# Altium PCB mdap4.PcbDoc (part 2 of 2)
Units mil, origin at the board's own origin, x right, y up, seen from the top; angles counter-clockwise.
Board outline 1970 x 1970 mil, 4 copper layers (Top Layer, Internal Plane 1, Signal Layer 1, Bottom Layer), stack 45.004 mil thick; 152 components, 121 nets, 477 pads, 250 vias.
Unrouted connection lines stored in the file: 1.
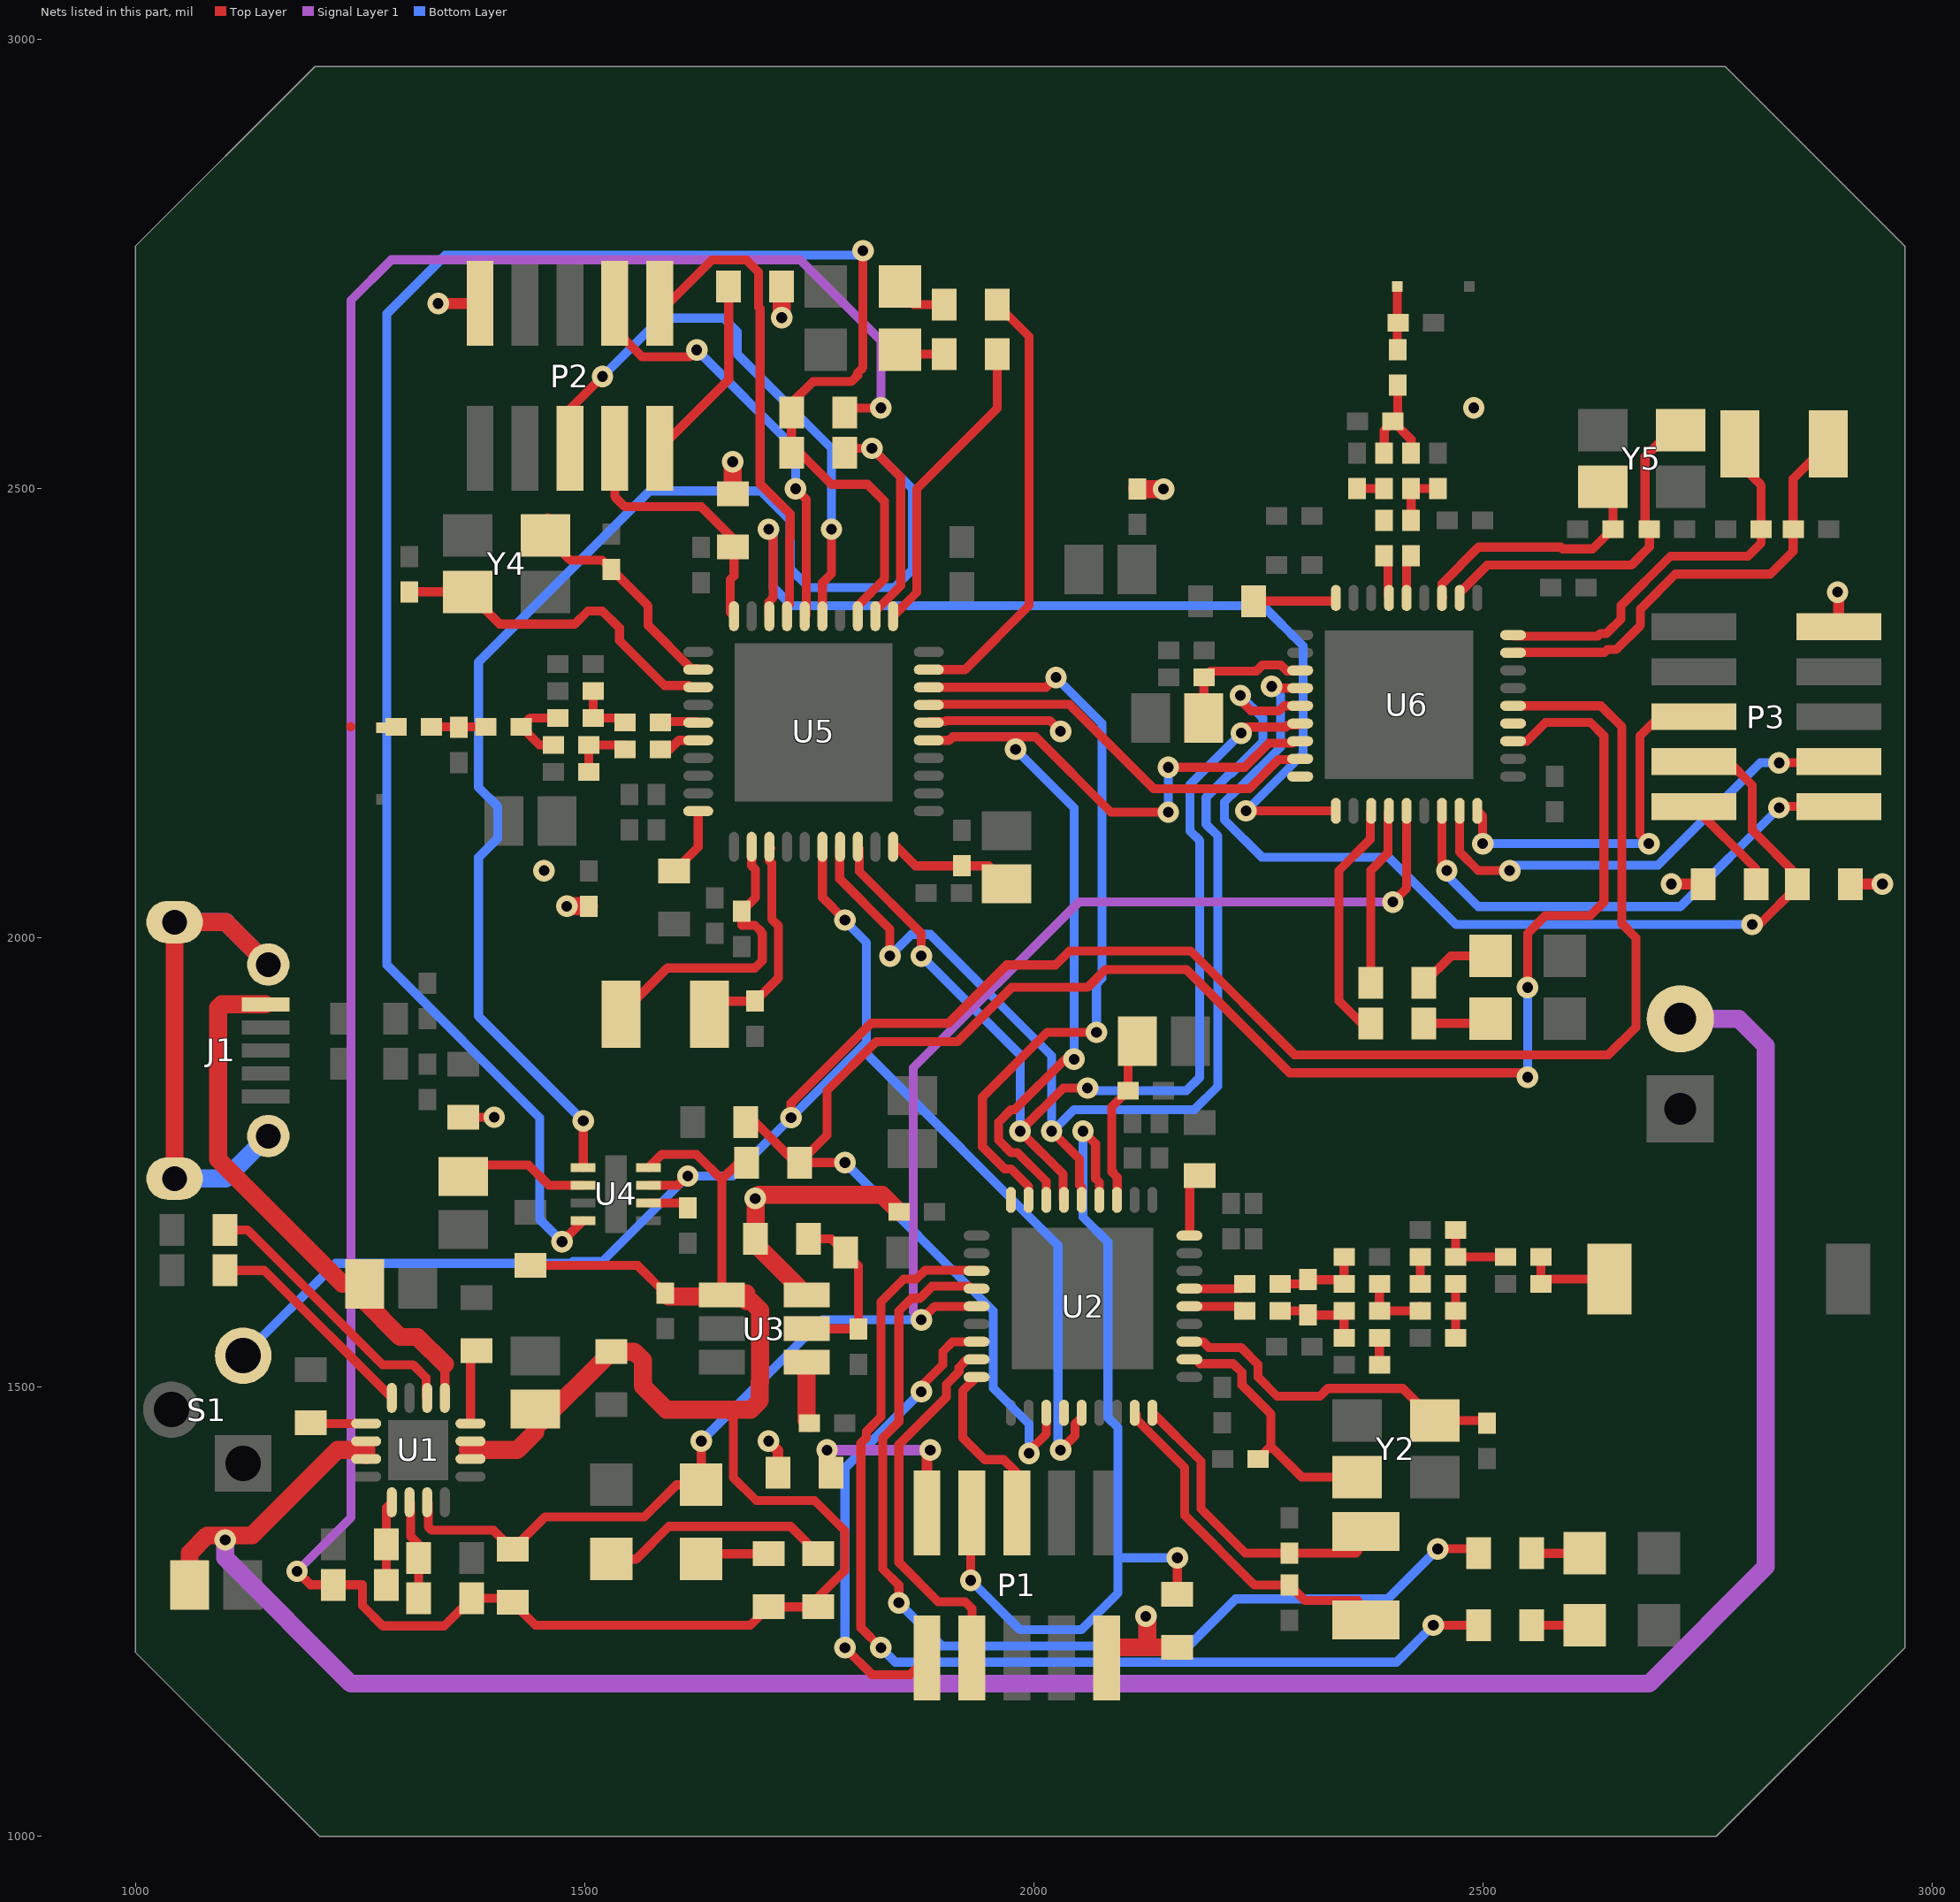
[diagram p4: the nets of this part, all layers, seen from the top]

## Via types
v1: diameter 24, hole 12, Top Layer to Bottom Layer, 219 vias
v2: diameter 31.5, hole 12, Top Layer to Bottom Layer, 27 vias
v3: diameter 24, hole 12, Top Layer to Bottom Layer, tented top, 4 vias

## Nets (pads, with @x,y where several pads share a name; then routed paths per layer and width w, separated by ;. In a path a pad name is that pad's centre, name@x,y a point inside that pad or via, vN(x,y) a via of type N, cw(c..) or ccw(c..) an arc to the next point about the centre after c; other vN are vias at no path point) (continued)
IRQ_C2510: U5.18 U6.1 | length 1095
  Top Layer w10: v1(1705,2455) 1710.1,2449.9 1710.1,2378.96 1705,2373.85 1705,2358.94 U5.18@1705.79,2358.15 ; v1(2236.5,2141.5) U6.1@2336.57,2141.5
  Bottom Layer w10: v1(1705,2455) 1710.1,2449.9 1710.1,2390.35 1730.46,2370 2255,2370 2300,2325 2300,2205 v1(2236.5,2141.5)
KILL_N: R33.1 U4.5 U5.12 | length 1670.8
  Top Layer w10: U4.5@1498.58,1744.53 v1(1498.58,1796.42) ; R33.1@1789.53,2545 v1(1820,2545) 1852,2513 1852,2392.02 1823.9,2363.92 U5.12@1823.9,2358.15
  Bottom Layer w10: v1(1498.58,1796.42) 1382,1913 1382,2089.72 1403.57,2111.29 1403.57,2146.08 1382,2167.65 1382,2307 1572.5,2497.5 1696.44,2497.5 1729,2464.94 1729,2411 1750,2390 1845,2390 1865,2410 1865,2500 v1(1820,2545)
MISO_1110: P1.10 U2.7 | length 534.7
  Top Layer w10: v1(1790,1210) 1820,1180 1862.6,1180 P1.10@1881.3,1198.7 ; v1(1875,1495) 1871.06,1495 1870,1496.06 1899,1525.06 1899,1539.6 1910.03,1550.63 U2.7@1936.5,1550.63
  Bottom Layer w10: v1(1790,1210) 1790,1410 v1(1875,1495)
MISO_2510: P3.10 U6.7 | length 573.5
  Top Layer w10: U6.7@2454.69,2141.5 2454.69,2075.31 2455,2075 v1(2460,2075) ; v1(2830,2145) 2831.3,2146.3 P3.10@2896.3,2146.3
  Bottom Layer w10: v1(2460,2075) 2460,2070 2495,2035 2720,2035 v1(2830,2145)
MISO_2540: P2.10 U5.17 | length 534.8
  Top Layer w10: P2.10@1583.7,2706.3 1593.31,2706.3 1641.72,2754.72 1680.28,2754.72 1693.75,2741.25 1693.75,2702.31 1695.53,2700.53 1695.53,2505.53 1729,2472.06 1729,2445.06 1728.1,2444.16 1728.1,2371.5 1725.47,2368.87 U5.17@1725.47,2358.15
MOSI_1110: P1.8 U2.8 | length 425.5
  Top Layer w10: P1.8@1931.3,1198.7 1931.3,1253.7 1924,1261 1894,1261 1850,1305 1850,1436.06 1903,1489.06 1903,1503.22 1917,1517.22 1917,1522 1925.94,1530.94 U2.8@1936.5,1530.94
MOSI_2510: P3.8 U6.8 | length 528.4
  Top Layer w10: U6.8@2474.37,2141.5 2474.37,2095.63 2495,2075 v1(2530,2075) ; v1@2831.3,2196.3 v1(2830,2195) 2895,2195 P3.8@2896.3,2196.3
  Bottom Layer w10: v1(2530,2075) 2536,2081 2694.94,2081 2808.94,2195 v1(2830,2195)
MOSI_2540: P2.8 U5.16 | length 483.7
  Top Layer w10: P2.8@1533.7,2706.3 1533.7,2677.12 1563.77,2647.06 1617.51,2647.06 v1(1625,2654.54) ; v1(1735,2500) 1747,2488 1747,2437.6 1746.84,2437.45 1746.84,2359.83 U5.16@1745.16,2358.15
  Bottom Layer w10: v1(1625,2654.54) 1735,2544.54 v1(1735,2500)
NetA200_1: A2.1 C68.2 L18.2 | length 70.4
  Top Layer w10: A2.1@2405,2725 2405,2655 L18.2@2405.31,2654.69
NetA300_1: A1.1 L12.2 | length 0.4
  Top Layer w10: 1239.65,2235.28 1239.92,2235
NetC107_1: C28.1 C29.1 U2.30 | length 190.3
  Top Layer w10: 2087,1739.69 2087,1812.16 2105.32,1830.47 2105.32,1874.84 C29.1@2115.47,1885 ; 2088.16,1739.69 2088.16,1738.53 2093.11,1733.58 U2.30@2093.11,1708.5
NetC109_2: C10.2 L1.2 | length 30
  Top Layer w10: C10.2@2385,1525 L1.2@2385,1555
NetC110_1: C15.1 L3.1 L6.2 | length 80.8
  Top Layer w10: L6.2@2385,1615 C15.1@2385,1585 L3.1@2430.63,1585 L3.1@2430.63,1590.16
NetC110_2: C14.2 C15.2 L1.1 L2.2 | length 104.8
  Top Layer w10: L2.2@2274.68,1585 2300.63,1585 C14.2@2305.32,1580.31 2340.94,1580.31 C15.2@2345.63,1585 L1.1@2345.63,1555
NetC111_1: C14.1 C18.2 L5.2 L6.1 | length 104.8
  Top Layer w10: L5.2@2274.68,1615 2300.63,1615 C14.1@2305.32,1619.68 2340.95,1619.68 L6.1@2345.63,1615 C18.2@2345.63,1645
NetC112_1: C19.1 L7.1 L8.1 | length 85
  Top Layer w10: C19.1@2469.68,1645.31 L8.1@2469.68,1675 ; C19.1@2470,1645 L7.1@2525.32,1645
NetC112_2: C19.2 L4.2 | length 30
  Top Layer w10: L4.2@2430.63,1615 C19.2@2430.63,1645
NetC113_2: C12.2 L3.2 L4.1 | length 59.7
  Top Layer w10: C12.2@2470,1555.32 L3.2@2470,1585 L4.1@2470,1615
NetC114_1: C17.1 E1.1 L7.2 | length 101.3
  Top Layer w10: C17.1@2564.68,1615 L7.2@2564.69,1645 L7.2@2565,1645.31 ; C17.1@2570,1620.31 E1.1@2640.87,1620.31
NetC116_2: C5.2 U2.20 Y2.1 | length 290
  Top Layer w10: U2.20@2173.82,1530.94 2180.3,1530.94 2185.08,1526.16 2222.15,1526.16 2231.84,1516.47 2231.84,1502.55 2264,1470.39 2264,1434.32 ; C5.2@2249.69,1420 2264,1434.32 ; Y2.1@2360,1400 2298.32,1400 2264,1434.32
NetC117_2: C4.2 U2.21 Y2.3 | length 384.2
  Top Layer w10: U2.21@2173.82,1550.63 2188.53,1550.63 2195,1544.16 2230.84,1544.16 2249.84,1525.16 2249.84,1511.22 2271.06,1490 2318.86,1490 2327.47,1498.61 2410.99,1498.61 Y2.3@2446.61,1462.99 2501.69,1462.99 C4.2@2505,1459.69
NetC118_2: C3.2 U2.18 Y1.1 | length 325.2
  Top Layer w10: U2.18@2132.48,1471.5 2186.32,1417.66 2186.32,1364.74 2235.74,1315.31 C3.2@2285,1315.31 2358.86,1315.31 Y1.1@2361.1,1317.56
NetC119_2: C1.2 U2.17 Y1.2 | length 370.4
  Top Layer w10: U2.17@2112.48,1471.5 2114.48,1469.5 2114.48,1464.04 2168.32,1410.21 2168.32,1357.29 2245.92,1279.69 C1.2@2285,1279.69 2302.24,1262.44 Y1.2@2361.1,1262.44 ; U2.17@2112.8,1471.5 U2.17@2113.53,1470.76
NetC207_1: C44.1 C47.1 U6.30 | length 160.6
  Top Layer w10: C44.1@2189.53,2245 C47.1@2189.53,2289.53 ; C47.1@2190,2290 2197.16,2297.16 2248.22,2297.16 2255.06,2304 2274.94,2304 2281.78,2297.16 2296.81,2297.16 U6.30@2296.81,2297.8
NetC209_2: C58.1 C66.2 L17.1 | length 65.6
  Top Layer w10: C58.1@2420.32,2464.69 L17.1@2420.31,2500.32 C66.2@2450.32,2500.32
NetC210_2: C58.2 U6.23 | length 48.9
  Top Layer w10: U6.23@2415.32,2378.5 2415.32,2420.31 C58.2@2420.32,2425.32
NetC211_1: C57.1 C65.2 L16.1 | length 30
  Top Layer w10: L16.1@2360.31,2500.32 C65.2@2390.32,2500.32
NetC211_2: C57.2 U6.24 | length 47.3
  Top Layer w10: C57.2@2390.32,2425.32 2394.44,2421.19 U6.24@2394.44,2379.69
NetC212_1: C65.1 C67.2 L17.2 L18.1 | length 125.6
  Top Layer w10: C65.1@2390.32,2539.69 2390.32,2565.32 C67.2@2400,2575 ; L18.1@2405.31,2615.32 2405.31,2580.32 C67.2@2400,2575 ; L17.2@2420.31,2539.69 2420.31,2554.69 C67.2@2400,2575
NetC215_2: C59.2 U6.20 Y5.1 | length 392.1
  Top Layer w10: U6.20@2474.37,2378.5 2474.37,2384.27 2505.1,2415 2665.32,2415 2685.63,2435.32 C59.2@2685.63,2455 2680.76,2459.87 2680.76,2535.44 2710.32,2565 Y5.1@2720.32,2565
NetC216_2: C61.2 U6.21 Y5.3 | length 285.4
  Top Layer w10: U6.21@2455.32,2379.13 U6.21@2454.69,2378.5 2454.69,2394.37 2495.32,2435 2587.01,2435 2588.85,2433.16 2622.41,2433.16 2644.25,2455 C61.2@2645,2455 2645,2490.71 Y5.3@2633.7,2502.01
NetC217_2: C62.2 U6.18 Y6.1 | length 417
  Top Layer w10: U6.18@2533.82,2337.17 2534.98,2336 2628.15,2336 2631.15,2339 2637.94,2339 2654,2355.06 2654,2370.05 2708.95,2425 2795.32,2425 2810,2439.69 C62.2@2810,2455 2810,2503.86 Y6.1@2792.76,2521.1
NetC218_2: C60.2 U6.17 Y6.2 | length 505
  Top Layer w10: U6.17@2533.82,2317.48 2534.34,2318 2635.6,2318 2638.6,2321 2648.52,2321 2675.64,2348.12 2675.64,2366.23 2714.41,2405 2820.32,2405 2845.63,2430.32 C60.2@2845.63,2455 2845.63,2511.1 Y6.2@2884.53,2550
NetC309_1: C45.1 C46.2 L14.1 | length 65.6
  Top Layer w10: L14.1@1509.68,2275 C46.2@1509.69,2245 C45.1@1545.32,2245
NetC309_2: C45.2 U5.25 | length 46.6
  Top Layer w10: C45.2@1584.69,2245 1584.69,2240.82 1625.48,2240.82 U5.25@1626.65,2239.65
NetC310_1: C46.1 L11.2 L13.1 | length 88.7
  Top Layer w10: L11.2@1465.31,2215 1449.68,2215 L13.1@1429.68,2235 1439.69,2245 C46.1@1470.32,2245
NetC311_2: C42.2 L12.1 L13.2 | length 60.6
  Top Layer w10: L12.1@1329.68,2235 L13.2@1390.31,2235
NetC312_1: C41.2 C43.1 L11.1 | length 70.6
  Top Layer w10: C41.2@1504.69,2185 L11.1@1504.68,2215 C43.1@1545.31,2215
NetC312_2: C43.2 U5.26 | length 46.1
  Top Layer w10: C43.2@1584.69,2210 1595.08,2210 1605.04,2219.96 U5.26@1626.65,2219.96
NetC314_2: C50.2 U5.23 Y4.1 | length 387.1
  Top Layer w10: C50.2@1305,2385.31 1369.69,2385.31 Y4.1@1370,2385 1405.62,2349.38 1489.14,2349.38 1503.77,2364 1506,2364 1519.94,2364 1539,2344.94 1539,2331 1589,2281 1616.16,2281 1616.16,2279.02 U5.23@1626.65,2279.02
NetC315_2: C55.2 U5.22 Y4.3 | length 247.6
  Top Layer w10: Y4.3@1456.61,2447.99 1483.98,2420.62 1519.69,2420.62 C55.2@1530,2410.31 1570.84,2369.47 1570.84,2348.02 1618.99,2299.87 1625.48,2299.87 U5.22@1626.65,2298.7 ; Y4.3@1458.9,2467.56 Y4.3@1461.14,2465.31
NetC316_2: C30.2 U5.33 Y3.1 | length 245.9
  Top Layer w10: Y3.1@1639.21,1915 1653.9,1929.69 C30.2@1690,1929.69 1716,1955.69 1716,2013.39 1708.42,2020.98 1708.42,2083.5 1705.79,2086.13 U5.33@1705.79,2101.46 U5.33@1707.42,2099.83
NetC317_2: C32.2 U5.32 Y3.2 | length 333.7
  Top Layer w10: Y3.2@1540.79,1915 1592.29,1966.5 1689.81,1966.5 1698,1974.69 1698,2004.88 ; U5.32@1686.1,2101.46 1686.1,2080.36 1690.42,2076.04 1690.42,2045.1 C32.2@1675,2029.69 1675,2014.13 1689.81,2014.13 1696.84,2007.1 1696.84,2006.03 1697,2005.88
NetC318_2: C34.2 C36.2 U5.40 | length 143.4
  Top Layer w10: U5.40@1843.58,2101.46 1847.48,2101.46 1868.63,2080.31 C36.2@1920,2080.31 1950.16,2080.31 C34.2@1970,2060.47
NetC401_2: C7.2 U3.4 | length 68.9
  Top Layer w20: U3.4@1747.24,1527.6 1747.24,1463.07 C7.2@1750.31,1460
NetC402_2: C9.2 R17.2 R18.1 U3.5 | length 196.1
  Top Layer w10: U3.5@1747.24,1565 1804.68,1565 C9.2@1805,1564.69 1805,1635 1775,1665 R18.1@1749.53,1665
NetC404_2: C2.2 P4.2 U1.2 U1.3 | length 2822.4
  Top Layer w20: C2.2@1060.47,1280 1060.47,1315.47 1080,1335 1130,1335 1225,1430 1255,1430 1256.93,1431.93 U1.3@1256.93,1423.98
  Signal Layer 1 w20: v1(1100,1330) 1100,1310 1240,1170 2685,1170 2815,1300 2815,1880 2785,1910 P4.2@2720,1910
NetC406_2: C20.2 U4.2 | length 45.8
  Top Layer w10: U4.2@1571.42,1705.16 1609.53,1705.16 C20.2@1615,1699.69
NetC407_2: C23.2 U4.6 | length 127.9
  Top Layer w10: C23.2@1380,1747.4 1437.6,1747.4 1460.16,1724.84 U4.6@1498.58,1724.84
NetD1_1: D1.1 R9.2 | length 59.1
  Top Layer w10: R9.2@2554.53,1315 D1.1@2613.66,1315
NetD2_1: D2.1 R2.2 | length 59.1
  Top Layer w10: R2.2@2554.53,1235 D2.1@2613.66,1235
NetD3_1: D3.1 R36.2 | length 34.1
  Top Layer w10: D3.1@1866.34,2705 R36.2@1900.47,2705
NetD4_1: D4.1 R35.2 | length 49.1
  Top Layer w10: D4.1@1851.34,2650 R35.2@1900.47,2650
NetD5_1: D5.1 R27.2 | length 86.6
  Top Layer w10: R27.2@2434.53,1950 2464.53,1980 D5.1@2508.66,1980
NetD6_1: D6.1 R25.2 | length 69.1
  Top Layer w10: R25.2@2434.53,1905 D6.1@2503.66,1905
NetD400_1: D7.1 R4.1 | length 257.7
  Top Layer w10: D7.1@1530,1308.66 1557.56,1308.66 1593.9,1345 1729.53,1345 R4.1@1760,1314.53
NetD401_1: D8.1 R3.1 | length 96.9
  Top Layer w10: D8.1@1616.22,1294.88 1635.87,1314.53 R3.1@1705,1314.53
NetJ1_6: J1.6 J1.7 J1.8 J1.9 | length 607.4
  Top Layer w20: J1.7@1043.62,1732.28 J1.9@1043.62,2017.72 1100.71,2017.72 J1.8@1147.95,1970.47
  Bottom Layer w20: J1.7@1068.62,1732.28 1100.71,1732.28 J1.6@1147.95,1779.53 ; J1.9@1068.62,2017.72 1101.2,2017.72 1101.2,2017.23 J1.8@1147.95,1970.47
NetL102_1: L2.1 U2.23 | length 63.6
  Top Layer w10: U2.23@2173.82,1590 2230.31,1590 L2.1@2235.31,1585
NetL106_1: L5.1 U2.24 | length 63.7
  Top Layer w10: U2.24@2173.82,1609.68 2230,1609.68 L5.1@2235.31,1615
NetP1_9: P1.9 R11.2 | length 213.3
  Top Layer w12: v1(1770,1430) 1774.53,1425.47 R11.2@1774.53,1405 ; P1.9@1881.3,1360.12 1881.3,1426.3 v1(1885,1430)
  Signal Layer 1 w12: v1(1770,1430) v1(1885,1430)
NetP2_9: P2.9 R37.2 | length 211.9
  Top Layer w10: P2.9@1583.7,2544.88 1660.47,2621.65 R37.2@1660.47,2725
NetP3_9: P3.9 R29.2 | length 115.1
  Top Layer w10: P3.9@2734.88,2146.3 2804.53,2076.65 R29.2@2804.53,2060
NetR2_1: R9.1 U2.4 | length 1151
  Top Layer w10: v1(1850,1260) 1850,1279.54 1832,1297.54 1832,1443.51 1850,1461.51 1850,1585 1864,1599 1873.54,1599 1886.86,1612.32 1927.71,1612.32 1930.34,1609.68 U2.4@1936.5,1609.68 ; v1(2450,1320) 2490.47,1320 R9.1@2495.47,1315
  Bottom Layer w10: v1(1850,1260) 1898,1212 2172.68,1212 2225,1264.32 2394.32,1264.32 v1(2450,1320)
NetR3_1: R2.1 U2.3 | length 1214.1
  Top Layer w10: v1(1830,1210) 1807.72,1232.28 1807.72,1437.72 1814,1444 1814,1450.97 1830,1466.97 1830,1595 1855.28,1620.28 1869.37,1620.28 1879.4,1630.32 1935.55,1630.32 U2.3@1936.5,1629.37 ; v1(2445,1235) R2.1@2495.47,1235
  Bottom Layer w10: v1(1830,1210) 1846,1194 2404,1194 v1(2445,1235)
NetR4_1: R36.1 U5.9 | length 490.9
  Top Layer w10: U5.9@1883.35,2298.7 1923.7,2298.7 1995,2370 1995,2669.53 R36.1@1959.53,2705
NetR5_1: R35.1 U5.11 | length 339.9
  Top Layer w10: U5.11@1843.58,2358.15 1870,2384.57 1870,2500 1959.53,2589.53 R35.1@1959.53,2650
NetR8_1: R27.1 U6.4 | length 199.8
  Top Layer w10: R27.1@2375.47,1950 2375.47,2075.47 2394.44,2094.44 2394.44,2140.31 U6.4@2395.63,2141.5
NetR9_1: R25.1 U6.3 | length 272.2
  Top Layer w10: R25.1@2375.47,1905 2365,1905 2340,1930 2340,2075 2374.76,2109.76 2374.76,2140.31 U6.3@2375.94,2141.5
NetR101_2: R20.2 U2.27 | length 62.9
  Top Layer w10: U2.27@2173.82,1668.74 R20.2@2173.82,1731.65
NetR202_2: R31.2 U6.27 | length 93.2
  Top Layer w10: R31.2@2244.84,2375 2333.07,2375 U6.27@2336.57,2378.5
NetR305_2: R28.2 U5.30 | length 77.7
  Top Layer w10: R28.2@1600,2074.53 1626.65,2101.18 U5.30@1626.65,2141.22
NetR404_1: R6.1 R8.2 U1.6 | length 111.2
  Top Layer w10: U1.6@1305.16,1371.93 1306.31,1370.78 1306.31,1334.17 1315.47,1325 R6.1@1315.47,1265
NetR405_1: R7.1 R10.2 U1.5 | length 94.4
  Top Layer w10: R7.1@1279.53,1280 R10.2@1279.53,1325 1279.53,1365.98 U1.5@1285.47,1371.93
NetR407_2: R19.2 U1.14 | length 315.1
  Top Layer w10: R19.2@1099.53,1675 1125,1675 1275,1525 1309.04,1525 1323.67,1510.37 1323.67,1489.24 U1.14@1324.84,1488.07
NetR409_2: R12.2 U1.1 | length 61
  Top Layer w10: R12.2@1195.94,1459.53 U1.1@1256.93,1459.53
NetR410_2: R14.2 U1.12 | length 83.8
  Top Layer w10: U1.12@1373.07,1459.53 1373.07,1533.54 R14.2@1380,1540.47
NetR411_2: R15.2 U1.16 | length 244.7
  Top Layer w10: R15.2@1099.53,1630 1143.54,1630 U1.16@1285.47,1488.07
NetU100_13: U2.13
NetU100_36: U2.36
NetU200_13: U6.13
NetU200_36: U6.36
NetU300_6: U5.6 | length 152.6
  Top Layer w10: U5.6@1883.35,2239.65 1884.7,2241 1901.6,2241 1902.6,2242 2018,2242 v1(2030,2230)
PB_N: S1.2 U2.14 U4.3 U5.36 U6.14 | length 3284.2
  Top Layer w10: U4.3@1571.42,1724.84 1603.88,1724.84 1614.04,1735 v1(1615,1735) ; v1(1730,1800) 1730,1816.01 1818.99,1905 1905,1905 1970,1970 2024.54,1970 2040,1985.46 2175,1985.46 2290.46,1870 2640,1870 2670.6,1900.6 2670.6,2000.04 2655,2015.64 2655,2235 2631.57,2258.43 U6.14@2533.82,2258.43 ; U5.36@1764.84,2101.46 1764.84,2045.16 v1(1790,2020) ; v1(2030,1430) 2046,1446 2046,1459.01 2053.43,1466.43 U2.14@2053.43,1471.5
  Bottom Layer w10: S1.2@1126.34,1535 S1.2@1120,1535 1222.89,1637.89 1484.94,1637.89 1487.05,1640 1520,1640 v1(1615,1735) 1665,1735 v1(1730,1800) 1814,1884 ; v1(1790,2020) 1790,2018.94 1814,1994.94 1814,1884 ; v1(2030,1430) 2027.25,1432.75 2027.25,1657.75 1814,1871 1814,1884
REQ_KILL: R33.2 R34.1 U4.8 U5.13 | length 2264.5
  Top Layer w10: v1@1475,1655 v1(1475,1661.89) U4.8@1498.58,1685.47 ; R33.2@1730.47,2540 R34.1@1730.47,2585 1730.47,2595.47 1754.38,2619.38 1797.25,2619.38 1804.28,2626.41 1804.28,2629.28 1810,2635 v1(1810,2765) ; R33.2@1730.47,2545 1735,2545 1775,2505 1815,2505 1833.72,2486.28 1834,2486.28 1834,2399.48 1804.21,2369.69 U5.13@1804.21,2358.15
  Bottom Layer w10: v1(1475,1661.89) 1450,1686.89 1450,1800 1280,1970 1280,2695 1345,2760 1805,2760 v1(1810,2765)
RST_1110: P1.7 R1.1 U2.31 | length 1001.1
  Top Layer w10: v1(1930,1285) 1930,1358.82 P1.7@1931.3,1360.12 ; v1(2055,1785) 2069,1771 2069,1732.24 2073.11,1728.12 U2.31@2073.11,1708.5 ; R1.1@2160,1269.53 v1(2160,1310)
  Bottom Layer w10: v1(1930,1285) 1985,1230 2053,1230 2094,1271 2094,1310 ; v1@2053.94,1785 v1(2055,1785) 2055,1689.24 2082.75,1661.49 2082.75,1466.19 2094,1454.94 2094,1310 ; v1(2160,1310) 2094,1310
RST_2510: P3.7 R30.1 U6.31 | length 1116.4
  Top Layer w10: v1@2273.11,2278.11 U6.31@2296.81,2278.11 ; P3.7@2734.88,2196.3 2773.7,2196.3 2800,2170 2800,2120.02 2850.47,2069.55 R30.1@2850.47,2060 2850.47,2057.48 2807.99,2015 v1(2800,2015)
  Bottom Layer w10: v1(2265,2280) 2275,2270 2275,2212.42 2228.07,2165.5 2226.55,2165.5 2212.5,2151.44 2212.5,2131.55 2254.05,2090 2395,2090 2470,2015 v1(2800,2015)
RST_2540: P2.7 R32.1 U5.20 | length 296.4
  Top Layer w10: P2.7@1533.7,2544.88 1533.7,2491.3 1545,2480 1630,2480 1666.08,2443.92 1666.42,2443.92 1665,2442.5 1665,2436.89 1666.42,2435.47 1666.42,2403.15 1662.1,2398.84 1662.1,2362.46 U5.20@1666.42,2358.15
SENSE_VBATT: R21.1 R22.2 U2.12 U6.12 | length 2129.5
  Top Layer w10: R22.2@1679.53,1795 1690,1795 1735,1750 R21.1@1739.53,1750 ; v1(1790,1750) R21.1@1739.53,1750 ; v1(1995,1426.36) 1995,1428.94 2014.06,1448 U2.12@2014.06,1471.5 ; U6.12@2533.82,2219.06 2549.06,2219.06 2570,2240 2620,2240 2635,2225 2635,2040 2620,2025 2570,2025 2550,2005 v1(2550,1945) ; v1(2550,1845) 2545,1850 2285,1850 2170,1965 2080,1965 2060,1945 1975.47,1945 1915,1884.53 1824.53,1884.53 1770,1830 1770,1780.47 R21.1@1739.53,1750
  Bottom Layer w10: v1(1790,1750) 1955,1585 1955,1498.94 1995,1458.94 v1(1995,1426.36) ; v1(2550,1845) v1(2550,1945)
SPI_CK: U2.34 U5.5 U6.34 | length 1109.5
  Top Layer w10: U5.5@1883.35,2219.96 1906.02,2219.96 1910.06,2224 2002.06,2224 2086.06,2140 v1(2150,2140) ; U2.34@2014.06,1708.5 2014.06,1729.12 1982.18,1761 1975.06,1761 1961,1775.06 1961,1794.94 1975.06,1809 1979,1809 2035,1865 v1(2045,1865) ; v1(2150,2190) 2235,2190 2261.69,2216.69 2288.06,2216.69 2290.42,2219.06 U6.34@2296.81,2219.06
  Bottom Layer w10: v1(1980,2210) 2045,2145 v1(2045,1865) ; v1(2150,2140) v1(2150,2190)
SPI_MI: U2.32 U5.37 U6.32 | length 1327.8
  Top Layer w10: U5.37@1784.53,2101.46 1784,2100.93 1784,2066 1840,2010 v1(1840,1980) ; v1(2020,1785) 2051,1754 2051,1724.78 2053.43,1722.35 U2.32@2053.43,1708.5 ; v1(2230.18,2270) 2230.18,2264.82 2242.31,2252.69 2273.15,2252.69 2278.88,2258.43 U6.32@2296.81,2258.43
  Bottom Layer w10: v1(1840,1980) 1864,2004 1884.94,2004 2020,1868.94 v1(2020,1785) 2021.06,1785 2045.06,1809 2179,1809 2205,1835 2205,2113.6 2192,2126.6 2192,2156.4 2219.1,2183.5 2220.62,2183.5 2255.18,2218.06 2255.18,2245 v1(2230.18,2270)
SPI_MO: U2.33 U5.38 U6.33 | length 1199.7
  Top Layer w10: U5.38@1804.21,2101.46 1805.9,2099.77 1805.9,2074.1 1875,2005 v1(1875,1980) ; U2.33@2033.74,1708.5 2033,1709.24 2033,1737 v1(1985,1785) 2033,1833 v1(2060,1833) ; v1(2231.18,2228) 2237.88,2234.69 2280.61,2234.69 2282.97,2237.06 2295.13,2237.06 U6.33@2296.81,2238.74
  Bottom Layer w10: v1(1875,1980) 1985,1870 v1(1985,1785) ; v1@2060,1830 v1(2060,1833) 2063,1830 2170,1830 2185,1845 2185,2108.14 2174,2119.14 2174,2170.82 v1(2231.18,2228)
SPI_SS_C1110: U2.35 U5.8 | length 861.6
  Top Layer w10: U5.8@1883.35,2279.02 2014.02,2279.02 v1(2025,2290) ; U2.35@1994.37,1708.5 1994.37,1723.35 1974.72,1743 1967.6,1743 1943,1767.6 1943,1823 2015,1895 v1(2070,1895)
  Bottom Layer w10: v1(2025,2290) 2076,2239 2076,1955 2070,1949 v1(2070,1895)
SPI_SS_C2510: U5.7 U6.35 | length 466.5
  Top Layer w10: U5.7@1883.35,2259.33 1884.02,2260 2040,2260 2134,2166 2239.94,2166 2272.64,2198.69 2296.14,2198.69 U6.35@2296.81,2199.37
SS_1110: P1.5 U2.9 | length 194.9
  Top Layer w10: U2.9@1936.5,1511.26 1921,1495.76 1921,1444 1945.64,1419.36 1966.7,1419.36 1981.3,1404.76 P1.5@1981.3,1360.12
SS_2510: P3.5 U6.9 | length 416.8
  Top Layer w10: U6.9@2494.06,2141.5 2500,2135.55 v1(2500,2105) ; v1(2685,2105) 2675,2115 2675,2225 2696.3,2246.3 P3.5@2734.88,2246.3
  Bottom Layer w10: v1(2500,2105) v1(2685,2105)
SS_2540: P2.5 U5.15 | length 642.8
  Top Layer w10: P2.5@1483.7,2544.88 1483.7,2588.7 v1(1520,2625) ; U5.15@1764.84,2358.15 1764.84,2395.3 1775,2405.46 v1(1775,2455)
  Bottom Layer w10: v1(1520,2625) 1585,2690 1655,2690 1670,2675 1670,2650 1775,2545 v1(1775,2455)
USB_PGOOD: D8.2 R5.1 U1.7 U2.5 U6.5 | length 1791.7
  Top Layer w10: U1.7@1324.84,1371.93 1326.02,1370.76 1326.02,1344.67 1329.97,1340.72 1398.81,1340.72 R5.1@1420,1319.53 1456.19,1355.72 1566.82,1355.72 1602.44,1391.34 D8.2@1630,1391.34 v1(1630,1440) ; v1(1875,1575) 1890,1590 U2.5@1936.5,1590 ; v1(2400,2040) 2415.32,2055.32 U6.5@2415.32,2141.5
  Signal Layer 1 w10: v1(1875,1575) 1866,1584 1866,1855.54 2050.46,2040 v1(2400,2040)
  Bottom Layer w10: v1(1630,1440) 1765,1575 v1(1875,1575)
VBATT: C8.2 C13.2 R3.2 R4.2 R5.2 R6.2 R7.2 R13.2 R16.2 R21.2 R34.2 U1.10 U1.11 U3.1 U4.4 | length 4254
  Top Layer w10: v1(1180,1295) 1195,1280 R7.2@1220.47,1280 1252.75,1280 1252.75,1256.9 1275.36,1234.28 1343.81,1234.28 R6.2@1374.53,1265 1415.47,1265 R5.2@1420,1260.47 1445.47,1235 1684.53,1235 R3.2@1705,1255.47 R4.2@1760,1255.47 1760,1266.06 1789.72,1295.78 1789.72,1340.28 1756.23,1373.77 1691.23,1373.77 1665.62,1399.38 1665.62,1464.38 1655,1475 ; R16.2@1435,1635.47 R16.2@1437.42,1637.89 ; R16.2@1440,1635.47 1559.21,1635.47 C13.2@1590,1604.69 ; U4.4@1571.42,1744.53 1585.89,1759 1624.94,1759 1652.76,1731.19 ; U3.1@1652.76,1602.4 1652.76,1604.69 1652.76,1731.19 ; R21.2@1680.47,1750 1671.57,1750 1652.76,1731.19 ; R34.2@1789.53,2585 1794.53,2590 v1(1830,2590)
  Top Layer w20: 1370,1430 1425.12,1430 1445,1449.88 1445,1454.53 R13.2@1530,1539.53 1555.47,1539.53 1565,1530 1565,1501.01 1591.01,1475 1655,1475 1685,1475 1695,1485 1695,1505.37 1695.35,1505.72 1695.35,1585.82 1685.39,1595.78 1680.31,1595.78 1680.31,1604.69 1652.76,1604.69 1649.07,1601 1593.68,1601 C13.2@1590,1604.69
  Signal Layer 1 w10: v1(1180,1295) 1240,1355 1240,2710 1285,2755 1740,2755 1830,2665 v1(1830,2590)
VBUS: C16.2 J1.1 U1.13 | length 619.1
  Top Layer w10: U1.13@1344.53,1488.07 1344.53,1525.47
  Top Layer w20: J1.1@1145,1926.18 1096.18,1926.18 1092.12,1922.12 1092.12,1753.35 1230.47,1615 C16.2@1255.47,1615 1255.47,1595.33 1295,1555.8 1314.2,1555.8 1344.53,1525.47
VDD: L9.2 L10.2 L15.2 P1.2 P2.2 P3.2 R1.2 R11.1 R18.2 R23.2 R29.1 R30.2 R32.2 R37.1 U3.6 | length 772.9
  Top Layer w10: R23.2@1365,1800.47 v1(1399.53,1800.47) v1@1400,1800
  Top Layer w12: v1(1337.09,2706.3) P2.2@1383.7,2706.3 ; v1(1705,1440) 1715.47,1429.53 R11.1@1715.47,1405 ; v1(2710,2060) R29.1@2740.47,2060 ; v1(2895,2385) 2896.3,2383.7 P3.2@2896.3,2346.3 ; R30.2@2909.84,2060 v1(2945,2060)
  Top Layer w20: v1@1480,2035 v1(1480.31,2035.31) L10.2@1505,2035.31 ; R32.2@1665,2494.53 v1(1665,2530) ; R37.1@1719.53,2725 v1(1719.53,2690.47) v1@1720,2690 ; U3.6@1747.24,1602.4 1690.47,1659.17 R18.2@1690.47,1665 1690.47,1709.53 v1(1690,1710) 1694,1714 1831.31,1714 L9.2@1850.31,1695 ; P1.2@2081.3,1198.7 2093.07,1210.47 2126.54,1210.47 ; L15.2@2115.31,2499.69 v1(2144.69,2499.69) ; v1(2125,1245) 2126.54,1243.46 2126.54,1210.47 ; R1.2@2160,1210.47 2126.54,1210.47
  Signal Layer 1 w12: v1@1335.79,2705 v1(1337.09,2706.3)
  other v1: 1455,2075 2490,2590
pads on no net: E1.2 S1.3 U1.15 Y2.2 Y2.4 Y4.2 Y4.4 Y5.2 Y5.4

## Polygon pours and split planes (outlines as drawn)
AVDD_CC1110 on Signal Layer 1 "Signal Layer 1-No Net" (solid, remove dead copper, pour order 7): 1900,1450 1900,1735 1925,1760 2270,1760 2295,1735 2295,1450
AVDD_CC2540 on Signal Layer 1 "Signal Layer 1-No Net" (solid, remove dead copper, pour order 8): 1510,2130 1510,2340 1600,2430 1840,2430 1925,2345 1925,2140 1850,2065 1575,2065 1510,2130
AVDD_CC2510 on Signal Layer 1 "Signal Layer 1-No Net" (solid, remove dead copper, pour order 11): 2585.63,2204.69 2585.63,2459.69 2545.32,2500 2245,2500 2155,2410 2155,2100 2200,2055 2505,2055 2585,2135 2585.63,2135.63 2585.63,2204.69
VDD on Signal Layer 1 "Signal Layer 1-No Net" (solid, remove dead copper, pour order 12): 1000,1200 2950,1200 2955,1195 2955,2775 1005,2775
GND on Top Layer "Signal Layer 1-No Net" (solid, remove dead copper, pour order 10): 1005,1195 2600,1195 2600,1770 2960,1770 2960,2680 1895,2680 1800,2775 1280,2775 1280,2045 1260,2025 1005,2025
GND on Bottom Layer "Signal Layer 1-No Net" (solid, remove dead copper, pour order 9): 1000,1205 2595,1205 2595,1770 2955,1770 2955,2690 1890,2690 1795,2785 1275,2785 1275,2055 1255,2035 1000,2035
GND on Internal Plane 1 (split plane): 2761.68,2949.9 2949.9,2761.68 2949.9,1218.32 2751.68,1020.1 1213.32,1020.1 1020.1,1213.32 1020.1,2761.68 1208.32,2949.9

## Keep-outs
Keep-Out Layer:
  lines w10: 2760,1005 2765,1005 ; 1000,1205 1200,1005 2770,1005 2965,1200 2965,2780 2775,2970 1190,2970 1000,2780 1000,1205

## Silkscreen, mask and mechanical layers (free items; w line width, h text height)
Mechanical 1:
  lines w10: 2760,1000 2765,1000 ; 1000,1200 1000,2775 1190,2965 2775,2965 2965,2775 2965,1195 2770,1000 1200,1000 1000,1200
Mechanical 3:
  circle w10: c1560,1675 r5
  circle w10: c1845,2140 r5
  circle w10: c2305,2155 r5
  circle w10: c1680,1605 r5
  lines w5: 1905.01,2385 1935,2385 1935,2441.65 1905.01,2441.65 1905.01,2385
  lines w10: 1040,1430 955,1430 955,1520 1040,1520 ; 1505,1375 1555,1375 ; 1605,1370 1605,1375 1655,1375 ; 1785,2630 1785,2680 ; 1785,2700 1785,2750 ; 2575,1885 2575,1935 ; 2575,1955 2575,2005 ; 2680,1210 2680,1260 ; 2680,1290 2680,1340 ; 970,1720 1170,1720 1170,2030 970,2030 970,1720 ; 1040,1385 1040,1565 1155,1565 1155,1385 1040,1385 ; 1350,2385 1350,2465 1475,2465 1475,2370 1365,2370 1350,2385 ; 1505,1310 1505,1390 1555,1390 1555,1310 1505,1310 ; 1530,1885 1650,1885 1650,1945 1530,1945 1530,1885 ; 1605,1310 1655,1310 1655,1390 1605,1390 1605,1310 ; 1635,2110 1875,2110 1875,2350 1635,2350 1635,2110 ; 1770,2630 1850,2630 1850,2680 1770,2680 1770,2630 ; 1770,2700 1850,2700 1850,2750 1770,2750 1770,2700 ; 1930,1465 2180,1465 2180,1715 1930,1715 1930,1465 ; 2340,1230 2400,1230 2400,1350 2340,1350 2340,1230 ; 2340,1400 2340,1480 2465,1480 2465,1385 2355,1385 2340,1400 ; 2510,1885 2510,1935 2590,1935 2590,1885 2510,1885 ; 2510,1955 2590,1955 2590,2005 2510,2005 2510,1955 ; 2615,1210 2615,1260 2695,1260 2695,1210 2615,1210 ; 2615,1290 2695,1290 2695,1340 2615,1340 2615,1290 ; 2615,2485 2740,2485 2740,2565 2725,2580 2615,2580 2615,2485 ; 2635,1580 2910,1580 2910,1660 2635,1660 2635,1580 ; 2665,1715 2665,2005 2975,2005 2975,1715 2665,1715 ; 2775,2520 2895,2520 2895,2580 2775,2580 2775,2520
  text "A2" at 2520,2865 h20
  text "P2" at 1380,2735 h20
  text "R37" at 1665,2715 h20
  text "D3" at 1795,2715 h20
  text "R36" at 1910,2695 h20
  text "C68" at 2400,2675 h20
  text "D4" at 1795,2650 h20
  text "R35" at 1905,2640 h20
  text "L18" at 2415,2610 h20 r90
  text "R34" at 1735,2575 h20
  text "C67" at 2355,2565 h20
  text "Y6" at 2820,2540 h20
  text "R33" at 1735,2530 h20
  text "Y5" at 2660,2520 h20
  text "L17" at 2430,2500 h20 r90
  text "L16" at 2370,2495 h20 r90
  text "C65" at 2400,2495 h20 r90
  text "C66" at 2460,2495 h20 r90
  text "C64" at 2265,2460 h20
  text "L15" at 2125,2455 h20 r90
  text "C63" at 2455,2455 h20
  text "R32" at 1675,2445 h20 r90
  text "C61" at 2600,2445 h20
  text "C59" at 2680,2445 h20
  text "C62" at 2765,2445 h20
  text "C60" at 2840,2445 h20
  text "C57" at 2400,2420 h20 r90
  text "C58" at 2430,2420 h20 r90
  text "Y4" at 1395,2410 h20
  text "C55" at 1540,2405 h20 r90
  text "C56" at 2265,2405 h20
  text "C53" at 2060,2400 h20
  text "C54" at 1640,2390 h20 r90
  text "C51" at 1930,2390 h20 r90
  text "C50" at 1315,2380 h20 r90
  text "C52" at 2570,2380 h20
  text "R31" at 2190,2365 h20
  text "P3" at 2805,2335 h20
  text "C49" at 2145,2310 h20
  text "C48" at 1465,2295 h20
  text "C47" at 2145,2280 h20
  text "L14" at 1465,2265 h20
  text "U5" at 1775,2250 h20
  text "C46" at 1465,2235 h20
  text "C44" at 2130,2235 h20
  text "C45" at 1540,2230 h20
  text "L12" at 1290,2225 h20
  text "L13" at 1380,2225 h20
  text "U6" at 2430,2225 h20
  text "L11" at 1465,2205 h20
  text "C43" at 1540,2200 h20
  text "A1" at 1100,2190 h20
  text "C42" at 1370,2190 h20 r90
  text "C41" at 1465,2175 h20
  text "C40" at 2590,2130 h20 r90
  text "C37" at 1420,2120 h20
  text "C38" at 1560,2115 h20 r90
  text "C39" at 1590,2115 h20 r90
  text "C36" at 1930,2075 h20 r90
  text "C34" at 1985,2065 h20 r90
  text "R29" at 2750,2050 h20
  text "R30" at 2855,2050 h20
  text "C35" at 1875,2040 h20
  text "L10" at 1515,2030 h20 r90
  text "R28" at 1615,2020 h20 r90
  text "C33" at 1655,2000 h20 r90
  text "C32" at 1685,1985 h20 r90
  text "D5" at 2530,1970 h20
  text "R27" at 2380,1940 h20
  text "C31" at 1335,1910 h20 r90
  text "Y3" at 1575,1905 h20
  text "R26" at 1235,1900 h20
  text "D6" at 2530,1900 h20
  text "R25" at 2380,1895 h20
  text "C30" at 1700,1885 h20 r90
  text "C29" at 2120,1875 h20
  text "J1" at 1065,1860 h20
  text "P4" at 2805,1855 h20
  text "R24" at 1235,1850 h20
  text "C28" at 2100,1820 h20
  text "C27" at 1335,1815 h20 r90
  text "R23" at 1375,1805 h20 r90
  text "R22" at 1625,1785 h20
  text "C26" at 1875,1770 h20 r90
  text "C24" at 2120,1750 h20 r90
  text "C25" at 2150,1750 h20 r90
  text "R21" at 1690,1740 h20
  text "R20" at 2195,1740 h20 r90
  text "U4" at 1525,1715 h20
  text "C23" at 1375,1685 h20 r90
  text "L9" at 1855,1685 h20
  text "R19" at 1045,1665 h20
  text "L8" at 2435,1665 h20
  text "C21" at 2230,1660 h20 r90
  text "C22" at 2255,1660 h20 r90
  text "C20" at 1625,1655 h20 r90
  text "R18" at 1700,1655 h20
  text "R16" at 1445,1645 h20 r90
  text "R17" at 1800,1640 h20
  text "C18" at 2340,1635 h20
  text "C19" at 2425,1635 h20
  text "L7" at 2530,1635 h20
  text "R15" at 1045,1620 h20
  text "C16" at 1265,1605 h20
  text "L5" at 2235,1605 h20
  text "L6" at 2350,1605 h20
  text "L4" at 2435,1605 h20
  text "C17" at 2525,1605 h20
  text "E1" at 2750,1605 h20
  text "L2" at 2235,1575 h20
  text "C14" at 2315,1575 h20 r90
  text "C15" at 2345,1575 h20
  text "L3" at 2435,1575 h20
  text "U3" at 1685,1565 h20
  text "C13" at 1600,1560 h20 r90
  text "U2" at 2075,1550 h20
  text "R14" at 1385,1545 h20 r90
  text "L1" at 2355,1545 h20
  text "C12" at 2425,1545 h20
  text "C11" at 2270,1535 h20
  text "C9" at 1815,1525 h20 r90
  text "C10" at 2340,1515 h20
  text "C8" at 1455,1490 h20 r90
  text "R13" at 1540,1480 h20 r90
  text "S1" at 1105,1465 h20
  text "C6" at 2220,1465 h20 r90
  text "R12" at 1205,1460 h20 r90
  text "C7" at 1755,1450 h20
  text "U1" at 1305,1425 h20
  text "Y2" at 2385,1425 h20
  text "C4" at 2515,1420 h20 r90
  text "C5" at 2210,1410 h20
  text "R11" at 1725,1395 h20
  text "D7" at 1540,1330 h20 r90
  text "D8" at 1640,1330 h20 r90
  text "R10" at 1225,1315 h20
  text "C3" at 2295,1315 h20 r90
  text "R9" at 2510,1305 h20
  text "D1" at 2630,1305 h20
  text "R8" at 1330,1300 h20
  text "Y1" at 2360,1285 h20
  text "R5" at 1430,1275 h20 r90
  text "C2" at 1075,1270 h20
  text "R7" at 1240,1270 h20
  text "R3" at 1715,1270 h20 r90
  text "R4" at 1770,1270 h20 r90
  text "R6" at 1330,1255 h20
  text "C1" at 2295,1245 h20 r90
  text "R1" at 2170,1240 h20 r90
  text "R2" at 2505,1225 h20
  text "D2" at 2630,1225 h20
  text "P1" at 1870,1145 h20